# EAGLE board untitled_device (EAGLE 6.3)
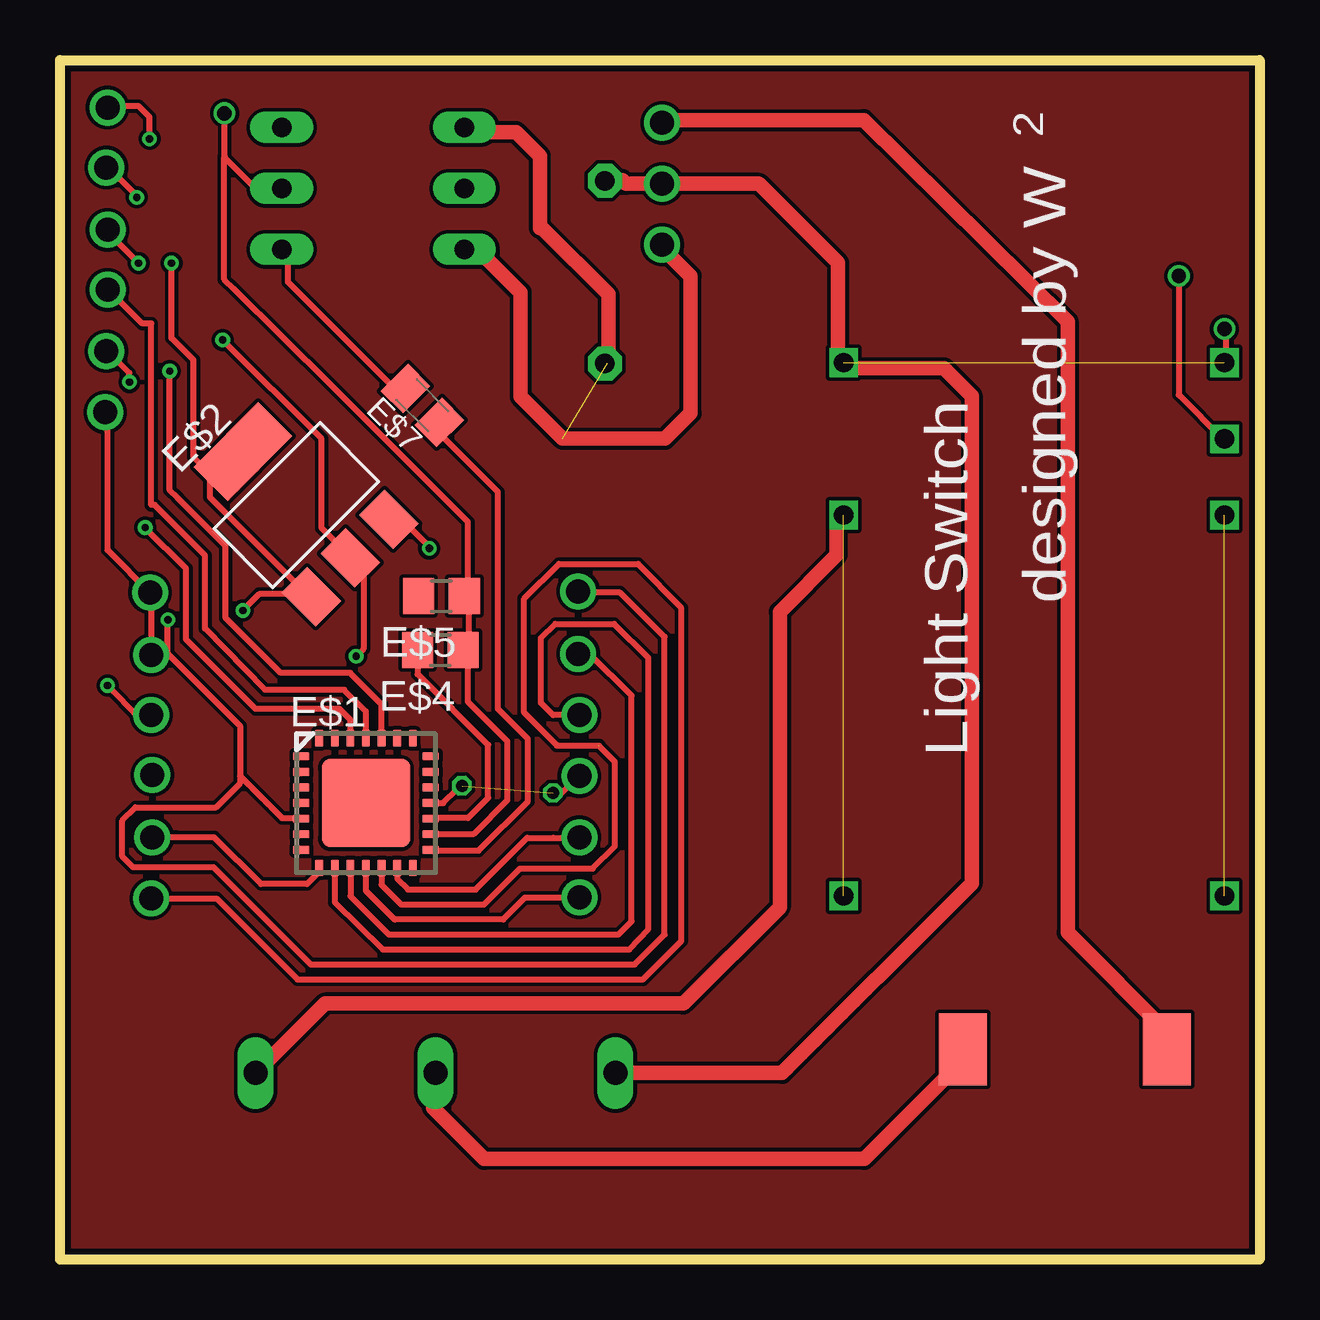
[diagram p0: board, top side]
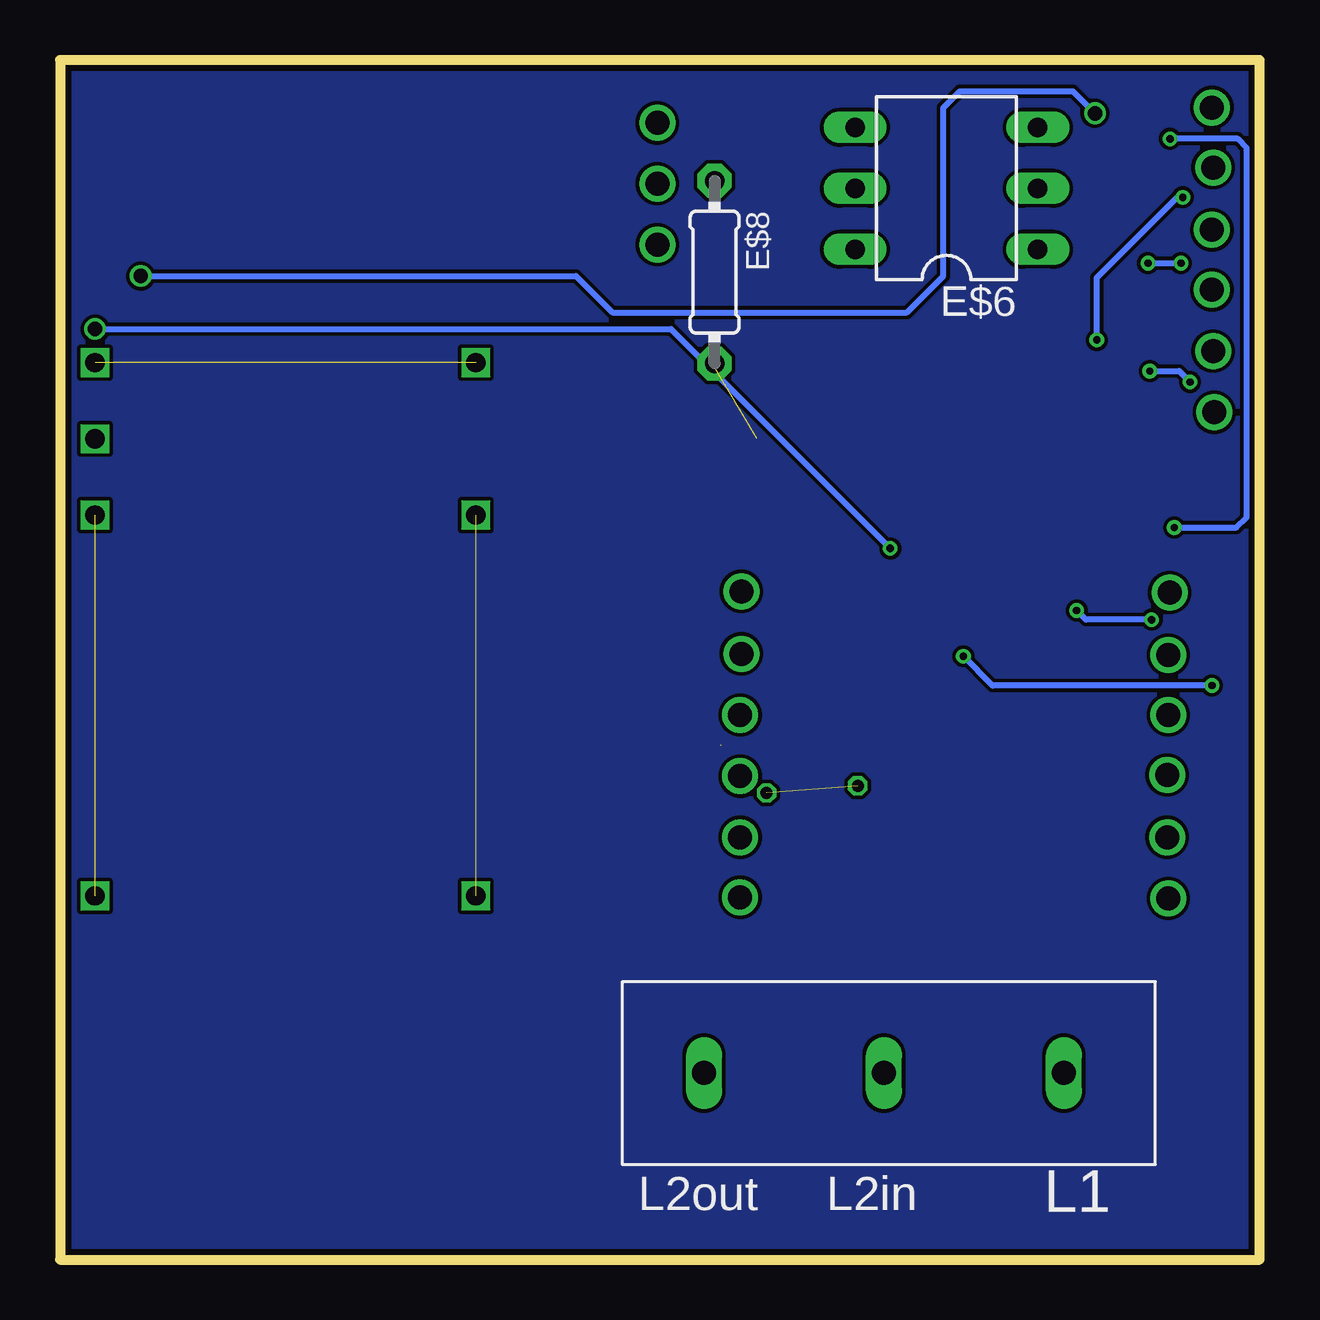
[diagram p1: board, bottom side, seen from below]

Size 50 x 50 mm. Coordinates in mm from the lower left corner, seen from the top.
Outline: 0,0 0,50 50,50 50,0 0,0
Copper layers (1*16): Top 0.035mm / dielectric 1.5mm / Bottom 0.035mm
Design rules "ITEADstudio_DRC": minimum track width 6mil, minimum drill 12mil, track to track 6mil, track to pad 6mil, pad to pad 6mil, via to via 6mil, smd to smd 0mil, copper to edge 10mil, drill to drill 10mil, minimum pad ring 10mil, minimum via ring 6mil, stop-mask expansion 2mil, vias tented up to drill 100mil, thermal gap 10mil

## Footprints (pad centres in the part's own frame; a part is rotated, then mirrored left to right if it is on the bottom)
QFN28-ML_6X6MM = smd 0.7 x 0.35: 1 -2.7,1.95; 2 -2.7,1.3; 3 -2.7,0.65; 4 -2.7,0; 5 -2.7,-0.65; 6 -2.7,-1.3; 7 -2.7,-1.95; 15 2.7,-1.95; 16 2.7,-1.3; 17 2.7,-0.65; 18 2.7,0; 19 2.7,0.65; 20 2.7,1.3; 21 2.7,1.95 | smd 0.35 x 0.7: 8 -1.95,-2.7; 9 -1.3,-2.7; 10 -0.65,-2.7; 11 0,-2.7; 12 0.65,-2.7; 13 1.3,-2.7; 14 1.95,-2.7; 22 1.95,2.7; 23 1.3,2.7; 24 0.65,2.7; 25 0,2.7; 26 -0.65,2.7; 27 -1.3,2.7; 28 -1.95,2.7 | smd 3.7 x 3.7: EXP 0,0
SOT223 = smd 1.499 x 2.007: 1 -2.261,-3.15; 2 0.025,-3.15; 3 2.311,-3.15 | smd 3.81 x 2.007: 4 0,3.15
CONNECTOR = drill 1 long: P$1 0,0; P$2 7.5,0; P$3 15,0
L0805 = smd 1.3 x 1.5: 1 -0.95,0; 2 0.95,0
DIL06 = drill 0.813 long: 1 -2.54,-3.81; 2 0,-3.81; 3 2.54,-3.81; 4 2.54,3.81; 5 0,3.81; 6 -2.54,3.81
C0805K = smd 1.3 x 1.6: 1 -1,0; 2 1,0
0204/7 = drill 0.813 pad 1.422 octagon: 1 -3.81,0; 2 3.81,0
FUSE = smd 2 x 3: P$1 -1,0; P$2 7.5,0

## Placement (x,y rotation side)
E$1  [QFN28-ML_6X6MM]  12.76,19.03 0 top
E$2  [SOT223]  9.85,31.45 45 top
E$3  [CONNECTOR]  8.15,7.77 0 top
E$4  [L0805]  15.85,25.4 180 top
E$5  [L0805]  15.9,27.65 180 top
E$6  [DIL06]  13.05,44.65 90 bottom
E$7  [C0805K]  15.11,35.6 135 top
E$8  [0204/7]  22.72,41.16 270 bottom
E$9  [FUSE]  38.63,8.76 0 top

## Library data of the parts
E$1 = microchip-6
E$2 = burr-brown 2
E$3 = connector7.5mm
E$4 E$5 = rcl 2
E$6 = ref-packages 2
E$7 = rcl-2
E$8 = qfm-trx1-24g
E$9 = fuse

## Nets
S$1: E$1.11
S$3: E$1.13
S$4: E$1.8
S$5: E$1.18
S$6: E$1.9
S$7: E$1.10
S$10: E$1.5
S$12: E$1.26
S$13: E$1.25
S$14: E$1.24
S$32: E$6.6
S$48: E$1.12
S$54: E$6.4

## Tracks (layer width: path | path; a pad name or v marks a point on that pad's centre or on a via)
S$1
  Top 0.254: 21.65,15.07 19.37,15.07 18.48,14.18 13.95,14.18 12.75,15.38 E$1.11
S$2  (via drill 1)
  Top 0.254: 4.03,15.05 v3.8,15.05 6.53,15.05 9.9,11.68 24.3,11.68 25.9,13.28 25.9,27.15 24.1,29 20.8,29
S$3
  Top 0.254: E$1.13 14.05,15.87 14.5,15.43 17.32,15.43 19.48,17.57 20.56,17.57 21.75,17.56
S$4
  Top 0.254: E$1.8 10.8,16.16 10.3,15.65 8.38,15.65 6.42,17.6 3.81,17.6 4.85,17.61
S$5
  Top 0.254: E$1.18 15.98,19.03 16.55,19.6
S$6
  Top 0.254: E$1.9 11.46,14.89 13.45,12.93 23.73,12.93 24.52,13.78 24.52,25.07 23.1,26.5 20.65,26.5 20.05,25.9 20.05,23.2 20.56,22.69 21.15,22.69
S$7
  Top 0.254: E$1.10 12.11,15.14 13.7,13.55 23.27,13.55 23.82,14.1 23.82,23.51 22.08,25.25 21.59,25.25 21.57,25.22
S$9
  Top 0.254: 14.85,25.35 14.9,25.3
S$10  (via drill 0.3, 1)
  Top 0.254: 3.8,25.23 4.52,25.23 7.5,22.25 7.5,20.15 | 7.5,20.15 9.25,18.4 10.03,18.4 E$1.5 | 3.8,25.23 3.82,25.2 v3.8,25.2 | 7.5,20.15 7.5,19.85 6.5,18.85 3.15,18.85 2.6,18.3 2.6,16.8 3.05,16.35 6.4,16.35 10.45,12.3 23.95,12.3 25.2,13.55 25.2,25.95 23.35,27.8 21.17,27.8 21.15,27.77 | 3.8,27.7 3.8,25.23 | 3.8,25.23 v3.8,25.2 | v4.5,26.67 4.5,25.3 v3.8,25.2 | 10.21,27.74 8.31,27.74 v7.62,27.05
  Bottom 0.254: v7.62,27.05 7.24,26.67 v4.5,26.67
S$12  (via drill 0.3)
  Top 0.254: E$1.26 12.11,22.5 11.65,22.95 8.15,22.95 5.25,25.85 5.25,28.8 v3.55,30.5 v3.55,30.51 | v3.73,46.71 3.73,47.62 3.28,48.08 1.98,48.08
  Bottom 0.254: v3.55,30.51 0.96,30.51 0.53,30.94 0.53,46.33 0.91,46.71 v3.73,46.71
S$13
  Top 0.254: E$1.25 12.76,22.84 11.85,23.75 8.55,23.75 6.05,26.3 6.05,29.35 3.95,31.45 3.81,31.45 3.81,39.01 3.43,39.01 2.06,40.39
S$14  (via drill 0.3)
  Top 0.254: E$1.24 13.4,23.14 12.1,24.45 9.2,24.45 6.9,26.75 6.9,29.75 4.9,31.75 4.57,32.08 v4.57,37.03 | v2.9,36.58 2.9,36.96 1.98,37.87
  Bottom 0.254: v4.57,37.03 3.35,37.03 v2.9,36.58
S$15
  Top 0.254: 14.7,16.4 14.7,16.2
S$16  (via drill 0.3, 1)
  Top 0.254: 11.9,29.4 11.9,29.5 10.91,30.49 | 10.91,30.49 10.9,30.5 10.9,34.21 v6.78,38.33 | 3.79,22.65 3.28,22.57 | 3.28,22.57 3.75,22.65 v3.8,22.7 | 10.91,30.49 12.65,28.73 12.65,25.45 12.27,25.07 12.5,25.15 v12.34,25.15 | 3.28,22.57 v1.98,23.93 | v3.2,44.27 3.2,44.35 2.06,45.49
  Bottom 0.254: v12.34,25.15 11.12,23.93 v1.98,23.93 | v6.78,38.33 6.78,40.92 3.43,44.27 v3.2,44.27
S$17  (via drill 0.5)  (1 unrouted)
  other vias: 16.75,19.75 20.55,19.45
S$18
  Top 0.254: 3.65,27.5 3.8,27.75 1.98,29.57 1.98,35.2 1.91,35.28
S$21  (via drill 1)
  other vias: 3.75,27.8
S$22
  Top 0.254: 15.55,18.4 17,18.4 17.85,19.25 17.85,21.45 14.9,24.4 14.9,25.05
S$23  (via drill 1)
  other vias: 3.85,20.2
S$24  (via drill 1)
  other vias: 3.85,17.6
S$25  (via drill 1)
  other vias: 21.65,15.1
S$26  (via drill 1)
  other vias: 21.65,17.6
S$27  (via drill 1)
  other vias: 21.65,20.15
S$28  (via drill 1)
  other vias: 21.65,22.7
S$29  (via drill 1)
  other vias: 21.6,25.25
S$30  (via drill 1)
  other vias: 21.6,27.85
S$31
  Top 0.254: 20.7,21.45 19.35,22.8 19.35,27.55 20.8,29
S$35  (via drill 1)
  other vias: 1.93,37.87
S$36  (via drill 1)
  other vias: 1.98,40.42
S$37  (via drill 1)
  other vias: 1.98,42.92
S$38  (via drill 1)
  other vias: 1.93,45.52
S$39  (via drill 1)
  other vias: 1.98,48.02
S$40  (via drill 1)
  other vias: 1.88,35.32
S$41
  Top 0.61: 17,47 19,47 20,46 20,43 20.09,43 22.86,40.23 22.86,37.41 22.71,37.26
S$42
  Top 0.254: 17.05,24.8 17.05,27.6 16.95,27.7
S$43
  Top 0.254: 15.55,17.75 17.25,17.75 18.65,19.15 18.65,21.6 17,23.25 17,25
S$44
  Top 0.254: 15.6,17.05 17.45,17.05 19.5,19.1 19.5,21.7 18.25,22.95 18.25,32
S$45
  Top 0.61: 37.34,8.69 37.34,8 33.53,4.19 17.68,4.19 15.54,6.33 15.54,7.62 15.62,7.7
S$46
  Top 0.61: 23,45 23.44,45 23.6,44.84 29.14,44.84 32.43,41.55 32.43,37.14
S$47
  Top 0.254: 9.5,44.5 9.75,44.75
S$48  (1 unrouted)
  Top 0.254: 22.45,21.43 23.12,20.75 23.12,17.23 22.2,16.3 19.18,16.3 17.68,14.8 14.22,14.8 13.4,15.62 E$1.12 | 20.7,21.43 22.47,21.43 22.48,21.41
S$50  (via drill 0.3, 0.6)
  Top 0.254: 48.6,37.5 48.6,38.82 v48.54,38.79 48.54,38.94
  Bottom 0.254: v48.54,38.79 24.54,38.79 v15.39,29.64
S$52
  Top 0.254: 48.37,34.35 48.54,34.18
S$55
  Top 0.254: 15.5,34.75 18.25,32
S$56  (1 unrouted)
  Top 0.61: 22.64,37.55 22.83,37.35 | 17,42 17.51,42 19.2,40.31 19.2,35.97 20.95,34.21 25.22,34.21 26.29,35.28 26.29,41 24.99,42.29
S$57
  Top 0.61: 25,47.5 33.5,47.5 42,39.1 42,13.63 46.33,9.3
S$58  (via drill 0.8)  (1 unrouted)
  other vias: 48.54,37.38 32.66,37.38
S$59  (via drill 0.8)
  other vias: 48.54,34.2
S$60  (via drill 0.8)  (1 unrouted)
  other vias: 48.54,31.03 48.54,15.15
S$61  (via drill 0.8)  (1 unrouted)
  other vias: 32.66,31.03 32.66,15.15
S$62
  Top 0.254: 21.64,22.71 21.03,22.71
S$63
  Top 0.254: 20.5,19.43 20.88,19.43 21.64,20.19
S$64  (via drill 1)
  other vias: 25.1,47.38
S$65  (via drill 0.6)
  Top 0.254: 17,28 17,30.75 11.3,36.45 7.25,40.45 6.85,40.85 6.85,45.95 | 9.25,44.5 8.3,44.5 6.85,45.95 | v6.86,47.78 6.86,46.02 6.85,45.95 | v46.63,41 46.63,36.04 48.54,34.14
  Bottom 0.254: v6.86,47.78 7.77,48.69 12.5,48.69 13.18,48.01 13.18,41 14.71,39.47 26.98,39.47 28.5,41 v46.63,41
S$66
  Top 0.254: 13.72,30.79 14.33,30.79 15.39,29.72
S$67
  Top 0.254: 10.8,27.9 10.45,28.3
S$68
  Top 0.254: 1.98,47.97 2.18,47.82
S$69  (via drill 1)
  other vias: 25.1,44.84
S$70  (via drill 0.3)
  Top 0.254: 1.98,42.9 1.98,42.82 v3.28,41.53 3.35,41.6 | v4.65,41.53 4.65,38.41 5.56,37.49 5.56,33.45 6.25,32.77 6.25,31.77 10.36,27.66
  Bottom 0.254: v4.65,41.53 v3.28,41.53
S$71
  pour Bottom: 0.08,49.91 49.91,49.91 49.91,0 0.08,0
S$72  (via drill 1)
  other vias: 25.1,42.3
S$73
  Top 0.61: 32.62,37.15 36.85,37.15 38,36 38,15.67 30.1,7.77 23.24,7.77 23.16,7.85
S$74
  pour Top: 0,49.99 49.99,49.99 49.99,0 0,0
S$76
  Top 0.61: 32.37,31 32.37,29.36 30,27 30,14.68 25.98,10.67 11.05,10.67 8.15,7.77
S$78
  Top 0.254: 14,36.25 9.5,40.75 9.5,42.5

## Text on the board
tPlace: 2 | Light Switch | designed by W
bPlace: L1 | L2in | L2out